# Altium PCB ESC.PcbDoc
Units mil, origin at the board's own origin, x right, y up, seen from the top; angles counter-clockwise.
Board outline 1560 x 2100 mil, 2 copper layers (Top Layer, Bottom Layer); 110 components, 75 nets, 462 pads, 139 vias.
Unrouted connection lines stored in the file: 3.
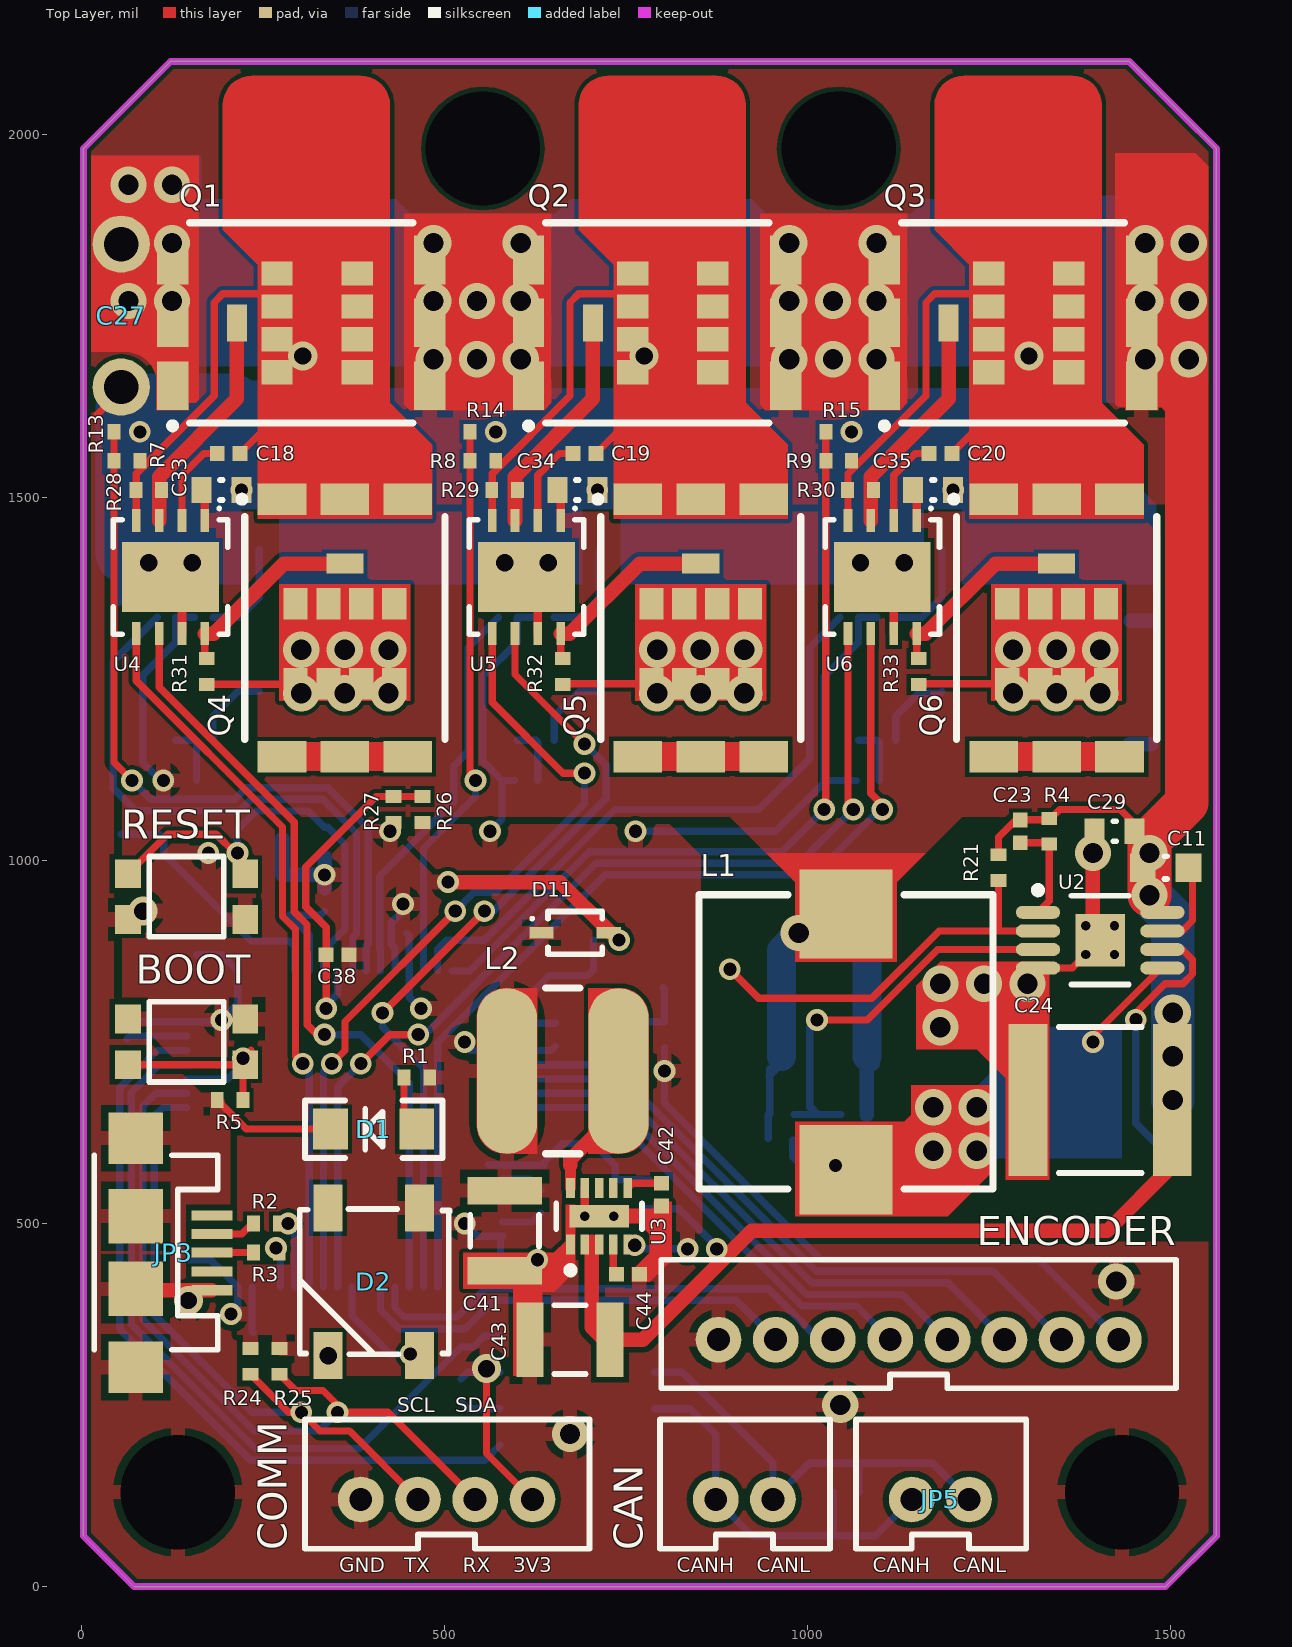
[diagram p0: Top Layer view]
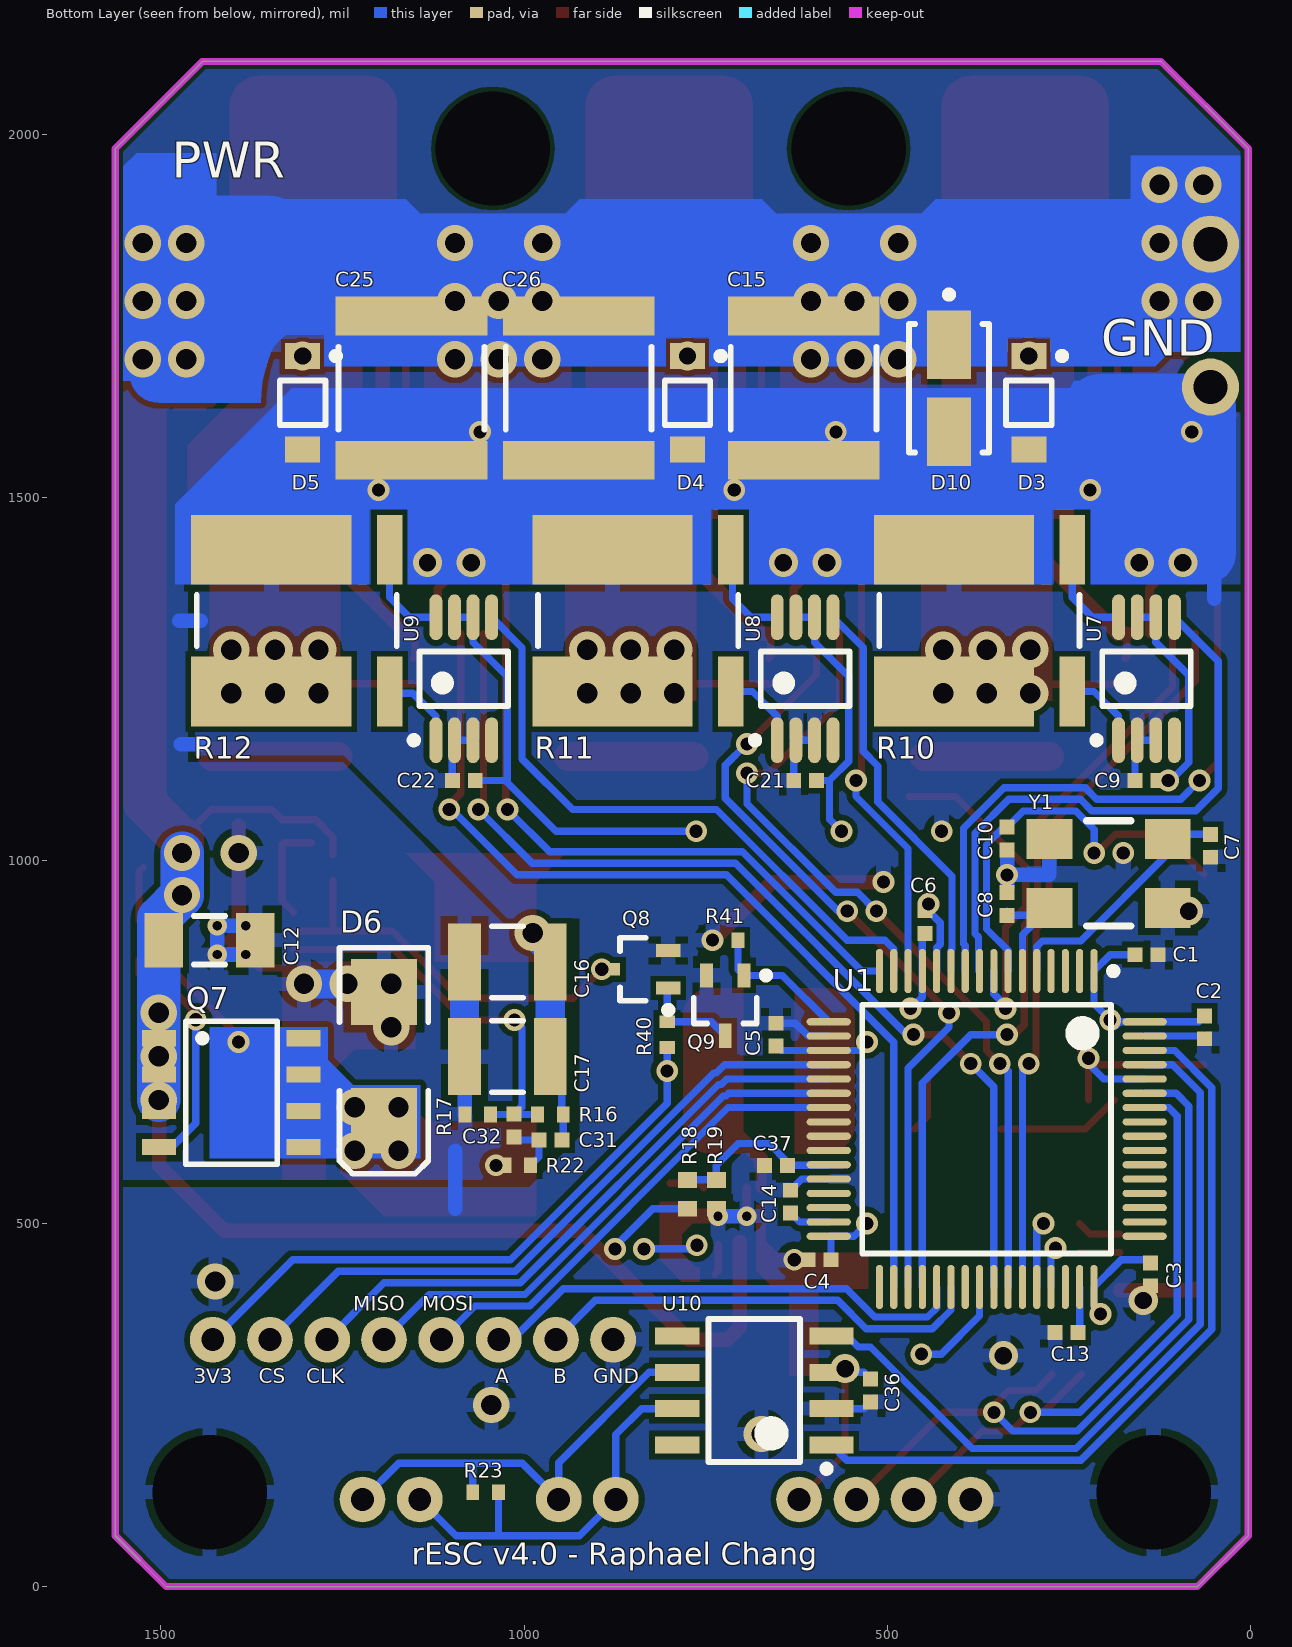
[diagram p1: Bottom Layer view, seen from below]

## Layer stack, top to bottom
Top Solder: solder mask 0.4, Solder Resist, Dk 3.5
Top Layer: signal copper 1.4
Dielectric 1: dielectric 12.6, FR-4, Dk 4.8
Bottom Layer: signal copper 1.4
Bottom Solder: solder mask 0.4, Solder Resist, Dk 3.5

## Board outline
3.01,69.71 72.72,0 1493.01,0 1563.01,70 1563.01,1980 1515,2028.01 1443.01,2100 123.01,2100 3.01,1980

## Design rules (kind name [scope] priority, off if disabled: settings)
Clearance Clearance_2 [All vs OnLayer('Keep-Out Layer')] p1: gap=5.91
Clearance Clearance_1 [(InPolygon AND InNet('GND'))] p2: gap=8
Clearance [All] p3: gap=5.91
ComponentClearance [All] p1: gap=10 collisioncheckmode=3 verticalgap=0 showdistances=FALSE
PolygonConnect [All] p1: connectstyle=Relief reliefconductorwidth=20 reliefentries=4 polygonreliefangle="90 Angle" airgapwidth=10
RoutingVias [All] p1: holewidth=28 width=50 viastyle="Through Hole" minholewidth=24 minwidth=40 maxholewidth=28 maxwidth=50
ShortCircuit ShortCircuit_1 [All vs OnLayer('Keep-Out Layer')] p1: allowed=TRUE
ShortCircuit [All] p2: allowed=FALSE
SolderMaskExpansion [All] p1: expansion=4
Width [All] p1: maxlimit=60 minlimit=10 preferedwidth=10
28 further rules are at their usual default settings.

## Classes and differential pairs
component class U_Power: C11 C12 C15 C16 C17 C18 C19 C20 C23 C24 C25 C26 C27 C29 C31 C32 C33 C34 C35 C41 C42 C43 C44 D3 D4 D5 D6 D10 D11 L1 L2 Q1 Q2 Q3 Q4 Q5 Q6 Q7 Q8 Q9 R4 R7 R8 R9 R10 R11 R12 R13 R14 R15 R16 R17 R21 R22 R28 R29 R30 R31 R32 R33 R40 R41 U2 U3 U4 U5 U6
component class U_MCU: BOOT C1 C2 C3 C4 C5 C6 C7 C8 C9 C10 C13 C14 C21 C22 C36 C37 C38 D1 D2 R1 R2 R3 R5 R18 R19 R23 R24 R25 R26 R27 RESET U1 U7 U8 U9 U10 Y1
component class ESC: CAN JP1 JP2 JP3 JP5

## Components (designator, comment, footprint, x,y, rotation, side; value= is the part's Value field where it differs from the comment)
BOOT "" SWITCH 145,750 r180 top (schematic designator SW1)
C1 "2.2uF" CAPC0402(1005)60_L 143.01,870 r0 bottom
C2 "2.2uF" CAPC0402(1005)60_L 63.01,770 r90 bottom
C3 "2.2uF" CAPC0402(1005)60_L 137.5,429.92 r90 bottom
C4 "2.2uF" CAPC0402(1005)60_L 593.01,450 r180 bottom
C5 "2.2uF" CAPC0402(1005)60_L 653.01,760 r270 bottom
C6 "4.7uF" CAPC0402(1005)60_L 448.01,915 r270 bottom
C7 "15pF" CAPC0402(1005)60_L 55,1020 r270 bottom
C8 "15pF" CAPC0402(1005)60_L 335,940 r90 bottom
C9 "0.1uF" CAPC0402(1005)60_L 143.01,1110 r0 bottom
C10 "100nF" CAPC0402(1005)60_L 335,1030 r90 bottom
C11 "0.47uF" CAPC0603(1608)100_N 1493.01,990 r180 top
C12 "10uF" CAPC1206(3216)190_M 1433.01,890 r0 bottom
C13 "2.2uF" CAPC0402(1005)60_L 253.01,350 r180 bottom
C14 "2.2uF" CAPC0402(1005)60_L 633.01,530 r270 bottom
C15 "15uF" CAPC2220(5750)280_L 615,1650 r90 bottom
C16 "47uF" CAPC1210(3225)280_N 1023.01,860 r180 bottom
C17 "47uF" CAPC1210(3225)280_N 1023.01,730 r180 bottom
C18 "0.22uF" CAPC0402(1005)60_L 203.01,1560 r180 top
C19 "0.22uF" CAPC0402(1005)60_L 693.01,1560 r180 top
C20 "0.22uF" CAPC0402(1005)60_L 1183.01,1560 r180 top
C21 "0.1uF" CAPC0402(1005)60_L 613.01,1110 r0 bottom
C22 "0.1uF" CAPC0402(1005)60_L 1083.01,1110 r0 bottom
C23 "1nF" CAPC0402(1005)60_L 1293.01,1040 r270 top
C24 "22uF" CAPC2220(5750)230_L 1403.01,670 r0 top
C25 "15uF" CAPC2220(5750)280_L 1155,1650 r90 bottom
C26 "15uF" CAPC2220(5750)280_L 925,1650 r90 bottom
C27 "2200uF" BULKCAPACITOR 55,1750 r0 top
C29 "1uF" CAPC0603(1608)100_L 1423.01,1040 r0 top
C31 "10nF" CAPC0402(1005)60_L 963.76,615 r180 bottom
C32 "0.1uF" CAPC0402(1005)60_L 1013.76,635 r270 bottom
C33 "4.7uF" CAPC0603(1608)100_L 193.01,1510 r180 top
C34 "4.7uF" CAPC0603(1608)100_L 683.01,1510 r180 top
C35 "4.7uF" CAPC0603(1608)100_L 1173.01,1510 r180 top
C36 "0.1uF" CAPC0402(1005)60_L 523.01,270 r90 bottom
C37 "0.1uF" CAPC0402(1005)60_L 653.01,580 r180 bottom
C38 "2.2uF" CAPC0402(1005)60_L 353.01,870 r180 top
C41 "47uF" CAPC1210(3225)280_L 583.01,490 r90 top
C42 "3.3nF" CAPC0402(1005)60_L 799.15,539.61 r90 top
C43 "4.7uF" CAPC1210(3225)210_L 673.01,340 r0 top
C44 "1uF" CAPC0402(1005)60_L 753.01,430 r180 top
CAN "" JST-2-PTH-VERT 913.01,120 r0 top (schematic designator JP4)
COMM "" JST-4-PTH-VERT 503.01,120 r0 top (schematic designator JP1)
D1 "LED-BLUE" LED-1206 403.01,630 r180 top
D2 "WS2812B" WS2812B 403.01,420 r270 top
D3 "MMSZ5262BT1G" ONSC-SOD-123-2-425-04_V 305,1630 r270 bottom
D4 "MMSZ5262BT1G" ONSC-SOD-123-2-425-04_V 775,1630 r270 bottom
D5 "MMSZ5262BT1G" ONSC-SOD-123-2-425-04_V 1305,1630 r270 bottom
D6 "" SMB 1193.01,730 r270 bottom
D10 "TVS 50V" VISH-DO-214AC-2_N 415,1650 r270 bottom
D11 "SP4020-01FTG" SOD323 680,900 r0 top
ENCODER "Encoder" JST-8-PTH-VERT 1153.01,340 r0 top (schematic designator JP2)
JP3 "USB" USB-MICROB 75,460 r270 top
JP5 "" JST-2-PTH-VERT 1183.01,120 r0 top
L1 "SDR0805-180ML" IHLP-4040DZ-51 1053.01,750 r90 top
L2 "SDR0805-180ML" SDR0604 663.01,710 r180 top
Q1 "IRF7749L2" DIRECTFET-9 303.01,1740 r0 top
Q2 "IRF7749L2" DIRECTFET-9 793.01,1740 r0 top
Q3 "IRF7749L2" DIRECTFET-9 1283.01,1740 r0 top
Q4 "IRF7749L2" DIRECTFET-9 363.01,1320 r270 top
Q5 "IRF7749L2" DIRECTFET-9 853.01,1320 r270 top
Q6 "IRF7749L2" DIRECTFET-9 1343.01,1320 r270 top
Q7 "MOSFET-P" SOIC127P600X175-8N 1403.01,680 r180 bottom
Q8 "BSS816NWH6327XTSA1" SOT323-3 843.01,850 r0 bottom
Q9 "BSS816NWH6327XTSA1" SOT323-3 723.01,800 r270 bottom
R1 "10R" RESC0402(1005)_L 462.24,700.83 r0 top
R2 "22R" RESC0402(1005)_L 255,500 r0 top
R3 "22R" RESC0402(1005)_L 255,460 r0 top
R4 "10K" RESC0402(1005)_L 1333.01,1040 r90 top
R5 "10K" RESC0402(1005)_L 205,670 r0 top
R7 "39K" RESC0402(1005)_L 63.01,1550 r0 top
R8 "39K" RESC0402(1005)_L 553.01,1550 r0 top
R9 "39K" RESC0402(1005)_L 1043.01,1550 r0 top
R10 "" WSL2726 373.01,1330 r270 bottom
R11 "" WSL2726 843.01,1330 r270 bottom
R12 "" WSL2726 1313.01,1330 r270 bottom
R13 "2K2" RESC0402(1005)_L 63.01,1590 r180 top
R14 "2K2" RESC0402(1005)_L 553.01,1590 r180 top
R15 "2K2" RESC0402(1005)_L 1043.01,1590 r180 top
R16 "36K" RESC0402(1005)_L 963.76,650 r180 bottom
R17 "3K9" RESC0402(1005)_L 1063.76,650 r180 bottom
R18 "200K" RESC0402(1005)_N 775,540 r90 bottom
R19 "10K" RESC0402(1005)_N 735,540 r90 bottom
R21 "200K" RESC0402(1005)_L 1263.01,990 r270 top
R22 "154K" RESC0402(1005)_L 1008.76,580 r180 bottom
R23 "120R" RESC0402(1005)_L 1053.01,130 r180 bottom
R24 "4K7" RESC0402(1005)_L 233.01,310 r90 top
R25 "4K7" RESC0402(1005)_L 273.01,310 r90 top
R26 "NTC_10K" RESC0402(1005)_L 470,1070 r270 top
R27 "10K" RESC0402(1005)_L 430,1070 r90 top
R28 "10K" RESC0402(1005)_L 93.01,1510 r0 top
R29 "10K" RESC0402(1005)_L 583.01,1510 r0 top
R30 "10K" RESC0402(1005)_L 1073.01,1510 r0 top
R31 "10K" RESC0402(1005)_L 173.01,1260 r90 top
R32 "10K" RESC0402(1005)_L 663.01,1260 r90 top
R33 "10K" RESC0402(1005)_L 1153.01,1260 r90 top
R40 "4K7" RESC0402(1005)_L 803.01,760 r270 bottom
R41 "4K7" RESC0402(1005)_L 723.01,890 r180 bottom
RESET "" SWITCH 145,950 r0 top (schematic designator SW2)
U1 "STM32F405RGT7TR" STM-LQFP64_L 363.01,630 r270 bottom
U2 "LM5085QMY/NOPB" MUY08A_N 1403.01,890 r0 top
U3 "MAX17502EATB+T" MAXM-T1032N+1_V 713.01,510 r90 top
U4 "UCC27211" DFN8 123.01,1390 r270 top
U5 "UCC27211" DFN8 613.01,1390 r270 top
U6 "UCC27211" DFN8 1103.01,1390 r270 top
U7 "AD8418" MSOP-8 143.01,1250 r90 bottom
U8 "AD8418" MSOP-8 613.01,1250 r90 bottom
U9 "AD8418" MSOP-8 1083.01,1250 r90 bottom
U10 "TCAN332" SOIC8 683.01,270 r0 bottom
Y1 "" ABRA-ABM3B-4_V 195.1,982.09 r0 bottom

## Footprints (in the part's own frame and the unit in brackets; to place one, negate y for a bottom-side part, rotate by r counter-clockwise, add the part's x,y. Pads: shape width x height; smd on the part's side, far side on the other; paste and mask are expansions set on the pad)
ABRA-ABM3B-4_V [mil] "SMT Crystal, 4-Leads, Body 5.2x3.4mm"
  rect 63x55 smd: 1(-81.5,-47.5) 2(-81.5,47.5) 2(81.5,-47.5) 3(81.5,47.5)
  silkscreen extent -30,-72 30,72, body extent -114,-52 113,51, height 39
BULKCAPACITOR [mm]
  round 2 hole 1.2: 1(0,2.5) 2(0,-2.5)
  body extent 2,-10 37,10, height 22
CAPC0402(1005)60_L [mm] "Chip Capacitor, Body 1.0x0.5mm, Height 0.6mm, IPC High Density"
  rect 0.52x0.52 smd: 1(-0.4,0) 2(0.4,0)
  body extent -0.55,-0.3 0.55,0.3, height 0.6
CAPC0603(1608)100_L [mm] "Chip Capacitor, Body 1.6x0.8mm, Height 1.0mm, IPC High Density"
  rect 0.7x0.9 smd: 1(-0.7,0) 2(0.7,0)
  silkscreen extent -0.05,-0.35 0.05,0.35, body extent -0.87,-0.47 0.88,0.48, height 1
CAPC0603(1608)100_N [mm] "Chip Capacitor, Body 1.6x0.8mm, Height 1.0mm, IPC Medium Density"
  rect 0.9x1 smd: 1(-0.8,0) 2(0.8,0)
  silkscreen extent -0.05,-0.4 0.05,0.4, body extent -0.87,-0.48 0.88,0.47, height 1
CAPC1206(3216)190_M [mm] "Chip Capacitor, Body 3.2x1.6mm, Height 1.9mm, IPC Low Density"
  rect 1.35x1.9 smd: 1(-1.6,0) 2(1.6,0)
  silkscreen extent -0.55,-0.85 0.55,0.85, body extent -1.7,-0.9 1.7,0.9, height 1.9
CAPC1210(3225)210_L [mm] "Chip Capacitor, Body 3.2x2.5mm, Height 2.1mm, IPC High Density"
  rect 0.95x2.6 smd: 1(-1.4,0) 2(1.4,0)
  silkscreen extent -0.55,-1.2 0.55,1.2, body extent -1.7,-1.35 1.7,1.35, height 2.1
CAPC1210(3225)280_L [mm] "Chip Capacitor, Body 3.2x2.5mm, Height 2.8mm, IPC High Density"
  rect 0.95x2.6 smd: 1(-1.4,0) 2(1.4,0)
  silkscreen extent -0.55,-1.2 0.55,1.2, body extent -1.7,-1.4 1.7,1.4, height 2.8
CAPC1210(3225)280_N [mm] "Chip Capacitor, Body 3.2x2.5mm, Height 2.8mm, IPC Medium Density"
  rect 1.15x2.7 smd: 1(-1.5,0) 2(1.5,0)
  silkscreen extent -0.55,-1.25 0.55,1.25, body extent -1.7,-1.4 1.7,1.4, height 2.8
CAPC2220(5750)230_L [mm] "Chip Capacitor, Body 5.7x5.0mm, Height 2.3mm, IPC High Density"
  rect 1.35x5.3 smd: 1(-2.525,0) 2(2.525,0)
  silkscreen extent -1.45,-2.55 1.45,2.55, body extent -3.05,-2.7 3.05,2.7, height 2.3
CAPC2220(5750)280_L [mm] "Chip Capacitor, Body 5.7x5.0mm, Height 2.8mm, IPC High Density"
  rect 1.35x5.3 smd: 1(-2.525,0) 2(2.525,0)
  silkscreen extent -1.45,-2.55 1.45,2.55, body extent -3.05,-2.7 3.05,2.7, height 2.8
DFN8 [mm] "SON, 8-Leads, Body 3.00x3.00mm, Pitch 0.65mm, Thermal Pad 2.00x1.47mm, IPC Medium Density"
  rect 0.8x0.3 smd: 1(-1.975,1.2) 2(-1.975,0.4) 3(-1.975,-0.4) 4(-1.975,-1.2) 5(1.975,-1.2) 6(1.975,-0.4) 7(1.975,0.4) 8(1.975,1.2)
  rect 2.45x3.38 smd: 9(0,0)
  silkscreen extent -2.45,-2 2,2, body extent -2,-2 2,2, height 1
DIRECTFET-9 [mm]
  rect 0.7x1.3 smd: 1(-2.25,0)
  rect 1.1x0.85 smd: 2(-0.85,-1.725) 2(-0.85,-0.575) 2(-0.85,0.575) 2(-0.85,1.725) 2(1.95,-1.725) 2(1.95,-0.575) 2(1.95,0.575) 2(1.95,1.725)
  rect 1.1x1.7 smd: 3(-4.5,-2.2) 3(-4.5,0) 3(-4.5,2.2) 3(4.5,-2.2) 3(4.5,0) 3(4.5,2.2)
  silkscreen extent -4.6,-3.7 3.9,3.5, body extent -4.57,-3.55 4.58,3.55, height 0.83
IHLP-4040DZ-51 [mil]
  rect 123x128 smd: 1(-176,0) 2(176,0)
  silkscreen extent -202,-202 202,202, body extent -200,-200 200,200, height 157
JST-2-PTH-VERT [mil]
  round 63 hole 31.5: 1(-39.37,0) 2(39.37,0)
  silkscreen extent -116,-68 118,110, body extent -114,-64 118,113, height 236
JST-4-PTH-VERT [mil]
  round 63 hole 31.5: 1(-118.11,0) 2(-39.37,0) 3(39.37,0) 4(118.37,0)
  silkscreen extent -195,-68 197,110, body extent -195,-67 195,110, height 236
JST-8-PTH-VERT [mil]
  round 63 hole 31.5: 1(-275.59,0) 2(-196.85,0) 3(-118.11,0) 4(-39.11,0) 5(39.89,0) 6(118.11,0) 7(196.85,0) 8(275.59,0)
  silkscreen extent -354,-67 354,110, body extent -352,-67 352,110, height 236
LED-1206 [mil]
  rect 48x56 smd: A(-59.06,0) C(60,0)
  silkscreen extent -94,-39 95,40, body extent -63,-31 63,31, height 43
MAXM-T1032N+1_V [mm] "TDFN, 10-Leads, Body 2x3mm, Pitch 0.50mm, Thermal Pad 0.8x2.08mm"
  rect 0.7x0.3 smd mask+0.076: 1(-0.99,1) 2(-0.99,0.5) 3(-0.99,0) 4(-0.99,-0.5) 5(-0.99,-1) 6(0.99,-1) 7(0.99,-0.5) 8(0.99,0) 9(0.99,0.5) 10(0.99,1)
  rect 0.8x2.08 smd mask+0.076: 11(0,0)
  silkscreen extent -2.01,-1.5 0.45,1.5, body extent -1,-1.5 1,1.5, height 0.8
MSOP-8 [mm] "SOP, 8-Leads, Body 3x3mm, Pitch 0.65mm, IPC Medium Density"
  oval 1.6x0.45 smd: 1(-2.15,0.975) 2(-2.15,0.325) 3(-2.15,-0.325) 4(-2.15,-0.975) 5(2.15,-0.975) 6(2.15,-0.325) 7(2.15,0.325) 8(2.15,0.975)
  silkscreen extent -2.27,-1.55 0.95,1.88, body extent -1.55,-1.55 1.55,1.55, height 0.05
MUY08A_N [mm] "TSOP, 8-Leads, Body 3x3mm, Pitch 0.65mm, Thermal Pad, IPC Medium Density"
  oval 1.55x0.45 smd: 1(-2.175,0.975) 2(-2.175,0.325) 3(-2.175,-0.325) 4(-2.175,-0.975) 5(2.175,-0.975) 6(2.175,-0.325) 7(2.175,0.325) 8(2.175,0.975)
  rect 1.73x1.85 smd: 9(0,0)
  silkscreen extent -2.3,-1.55 1,1.87, body extent -1.55,-1.55 1.55,1.55, height 1.09
ONSC-SOD-123-2-425-04_V [mm] "SOD, 2-Leads, Body 2.69x1.6mm"
  rect 0.91x1.22 smd: 1(-1.635,0) 2(1.635,0)
  silkscreen extent -1.76,-0.8 0.78,1.28, body extent -1.35,-0.8 1.35,0.8, height 1.35
RESC0402(1005)_L [mm] "Chip Resistor, Body 1.0x0.5mm, IPC High Density"
  rect 0.45x0.55 smd: 1(-0.45,0) 2(0.45,0)
  body extent -0.52,-0.27 0.53,0.28, height 0.4
RESC0402(1005)_N [mm] "Chip Resistor, Body 1.0x0.5mm, IPC Medium Density"
  rect 0.55x0.65 smd: 1(-0.5,0) 2(0.5,0)
  body extent -0.52,-0.27 0.53,0.28, height 0.4
SDR0604 [mm]
  rrect100% 2.1x5.8 smd: 1(-1.95,0) 2(1.95,0)
  Top Layer region: 2,2.9 0.9,2.9 0.9,-2.9 2,-2.9 2.5,-2.766 2.866,-2.4 3,-1.9 3,-1.9 3,1.9 2.866,2.4 2.5,2.766 2,2.9
  Top Layer region: -2,2.9 -0.9,2.9 -0.9,-2.9 -2,-2.9 -2.5,-2.766 -2.866,-2.4 -3,-1.9 -3,-1.9 -3,1.9 -2.866,2.4 -2.5,2.766 -2,2.9
  silkscreen extent -0.6,-2.9 0.6,2.9, body extent -2.75,-2.8 2.75,2.8, height 4.55
SMB [mm] "DO-214-AA/SMB; 2 C-Bend Leads; Body 5.3 x 3.6 mm, inc. leads (LxW)"
  rect 2.3x2.3 smd: 1(-2.25,0) 2(2.25,0)
  silkscreen extent -3.8,-1.55 4.1,1.55
SOD323 [mm] "SODFL, 2-Leads, Body 1.30x2.57mm, IPC Medium Density"
  rect 0.85x0.4 smd: 1(-1.175,0) 2(1.175,0)
  silkscreen extent -1.55,-0.75 0.95,0.75, body extent -0.95,-0.72 0.95,0.72, height 1.14
SOIC8 [mm] "SOIC, 8-Leads, Body 4.90x3.90mm, Pitch 1.27mm, IPC Medium Density"
  rect 1.55x0.6 smd: 1(-2.7,1.905) 2(-2.7,0.635) 3(-2.7,-0.635) 4(-2.7,-1.905) 5(2.7,-1.905) 6(2.7,-0.635) 7(2.7,0.635) 8(2.7,1.905)
  silkscreen extent -2.65,-2.5 1.6,2.86, body extent -2,-2.5 2,2.5, height 1.75
SOIC127P600X175-8N [mm] "SOIC, 8-Leads, Body 4.90x3.90mm, Pitch 1.27mm, IPC Medium Density"
  rect 1.194x0.56 smd: 1(-2.528,-0.635) 1(-2.528,0.635) 1(-2.528,1.905) 2(-2.528,-1.905) 3(2.527,-1.905) 3(2.527,-0.635) 3(2.527,0.635) 3(2.527,1.905)
  Top Layer region: -0.762,2.032 2.286,2.032 2.286,-2.032 -0.762,-2.032
  silkscreen extent -1.6,-2.5 1.6,2.5
SOT323-3 [mm] "SOT23, 3-Leads, Body 2.00x2.10mm, Pitch 0.65mm, IPC Medium Density"
  rect 0.85x0.45 smd: 1(-1.055,0.65) 2(-1.055,-0.65) 3(1.055,0)
  silkscreen extent -1.18,-1.1 0.63,1.55, body extent -0.63,-1.1 0.63,1.1, height 1
STM-LQFP64_L [mm] "Thin QFP, 64-Leads, Body 10x10mm, Pitch 0.5mm, IPC High Density"
  oval 1.55x0.25 smd: 1(-5.525,3.75) 2(-5.525,3.25) 3(-5.525,2.75) 4(-5.525,2.25) 5(-5.525,1.75) 6(-5.525,1.25) 7(-5.525,0.75) 8(-5.525,0.25) 9(-5.525,-0.25) 10(-5.525,-0.75) 11(-5.525,-1.25) 12(-5.525,-1.75) 13(-5.525,-2.25) 14(-5.525,-2.75) 15(-5.525,-3.25) 16(-5.525,-3.75) 33(5.525,-3.75) 34(5.525,-3.25) 35(5.525,-2.75) 36(5.525,-2.25) 37(5.525,-1.75) 38(5.525,-1.25) 39(5.525,-0.75) 40(5.525,-0.25) 41(5.525,0.25) 42(5.525,0.75) 43(5.525,1.25) 44(5.525,1.75) 45(5.525,2.25) 46(5.525,2.75) 47(5.525,3.25) 48(5.525,3.75)
  oval 0.25x1.55 smd: 17(-3.75,-5.525) 18(-3.25,-5.525) 19(-2.75,-5.525) 20(-2.25,-5.525) 21(-1.75,-5.525) 22(-1.25,-5.525) 23(-0.75,-5.525) 24(-0.25,-5.525) 25(0.25,-5.525) 26(0.75,-5.525) 27(1.25,-5.525) 28(1.75,-5.525) 29(2.25,-5.525) 30(2.75,-5.525) 31(3.25,-5.525) 32(3.75,-5.525) 49(3.75,5.525) 50(3.25,5.525) 51(2.75,5.525) 52(2.25,5.525) 53(1.75,5.525) 54(1.25,5.525) 55(0.75,5.525) 56(0.25,5.525) 57(-0.25,5.525) 58(-0.75,5.525) 59(-1.25,5.525) 60(-1.75,5.525) 61(-2.25,5.525) 62(-2.75,5.525) 63(-3.25,5.525) 64(-3.75,5.525)
  silkscreen extent -5.65,-4.35 4.35,4.55, body extent -5,-5 5,5, height 1.6
SWITCH [mm]
  rect 0.9x1 smd: 1(-2.05,0.8) 2(2.05,0.8) 3(-2.05,-0.8) 4(2.05,-0.8)
  silkscreen extent -1.3,-1.4 1.3,1.4, body extent -2.3,-1.4 2.3,1.4, height 1.9
USB-MICROB [mil]
  rect 14x56 smd: D+(0,105) D-(-25.59,105) GND(52,105) ID(26,105) VBUS(-51.18,105)
  rect 71x75 smd: MT1(-157.48,0) MT2(158,0)
  rect 75x75 smd: P$1(-50,0) P$2(50,0)
  silkscreen extent -134,-57 134,113, body extent -157,-98 157,115, height 112
VISH-DO-214AC-2_N [mm] "DO-214AC, 2-Leads, Body 4.5x2.79mm, IPC Medium Density"
  rect 2.4x1.55 smd: 1(-1.525,0) 2(1.525,0)
  silkscreen extent -3.4,-1.4 2.25,1.4, body extent -2.25,-1.4 2.25,1.39, height 2.29
WS2812B [mil]
  rect 65x40 smd: 1(-101.46,63) 2(-101.46,-62.99) 3(102,-62.99) 4(102,63)
  silkscreen extent -100,-102 100,104, body extent -105,-97 105,97, height 67
WSL2726 [mm]
  rect 2.44x5.6 smd: 1(-2.48,-0.89) 2(2.48,-0.89)
  rect 2.44x0.89 smd: 3(-2.48,3.245) 4(2.48,3.245)
  silkscreen extent -0.9,-3.5 0.9,3.5

## Part data
BOOT RESET: library part DIPT-DTSM-6, "Switch, SPNO Push Button SMD"
C1 C2 C3 C4 C5 C13 C14 C38: library part CMP-1034-02125-1, "CAP 2.2uF 6.3V ±10% 0402 (1005 Metric) Thickness 0.6mm SMD"
C6: library part CMP-1034-02136-1, "CAP 4.7uF 6.3V ±10% 0402 (1005 Metric) Thickness 0.6mm SMD"
C7 C8: library part CMP-1034-01906-1, "CAP 15nF 6.3V ±10% 0402 (1005 Metric) Thickness 0.6mm SMD"
C9 C10 C21 C22 C36 C37: library part CMP-1034-02060-1, "CAP 100nF 6.3V ±5% 0402 (1005 Metric) Thickness 0.6mm SMD"
C11: library part CMP-1035-02708-1, "CAP 470nF 50V ±10% 0603 (1608 Metric) Thickness 1mm SMD"
C12: library part CMP-1037-04982-1, "CAP 10uF 50V ±10% 1206 (3216 Metric) Thickness 1.9mm SMD"
C15 C25 C26: library part CMP-1042-00760-1, "CAP 4.7uF 100V ±10% 2220 (5750 Metric) Thickness 2.8mm SMD"
C16 C17: library part CMP-1038-02295-1, "CAP 47uF 16V ±10% 1210 (3225 Metric) Thickness 2.8mm SMD"
C18 C19 C20: library part CMP-1034-02089-1, "CAP 220nF 16V ±10% 0402 (1005 Metric) Thickness 0.6mm SMD"
C23: library part CMP-1034-01624-1, "CAP 1nF 50V ±1% 0402 (1005 Metric) Thickness 0.6mm SMD"
C24: library part CMP-1042-00782-1, "CAP 22uF 50V -20% to +80% 2220 (5750 Metric) Thickness 2.2mm SMD"
C27: library part "CAP 2200uF", "Polarized Capacitor (Axial)"
C29: library part CMP-1035-02745-1, "CAP 1uF 50V ±10% 0603 (1608 Metric) Thickness 1mm SMD"
C31: library part CMP-1034-01885-1, "CAP 10nF 50V ±5% 0402 (1005 Metric) Thickness 0.6mm SMD"
C32: library part CMP-1034-02077-1, "CAP 100nF 50V ±10% 0402 (1005 Metric) Thickness 0.6mm SMD"
C33 C34 C35: library part CMP-1035-02788-1, "CAP 4.7uF 16V ±10% 0603 (1608 Metric) Thickness 1mm SMD"
C41: library part CMP-1038-02290-1, "CAP 47uF 6.3V ±10% 1210 (3225 Metric) Thickness 2.8mm SMD"
C42: library part CMP-1034-01765-1, "CAP 3.3nF 6.3V ±5% 0402 (1005 Metric) Thickness 0.6mm SMD"
C43: library part CMP-1038-02103-1, "CAP 2.2uF 100V ±10% 1210 (3225 Metric) Thickness 2.1mm SMD"
C44: library part CMP-1034-02113-1, "CAP 1uF 6.3V ±10% 0402 (1005 Metric) Thickness 0.6mm SMD"
CAN JP5: library part JST_2_VERT
COMM: library part JST_4_VERT
D1: library part LED-BLUE1206
D3 D4 D5: library part CMP-1060-00504-1, "Zener Voltage Regulator, 500 mW, 2-Pin SOD-123, Pb-Free, Tape and Reel"
D6: library part "D Schottky", "Schottky Diode"
D10: library part CMP-0548-00253-1, "Transient Voltage Suppressor, 6.40 to 231 V, 45 V Stand-off Voltage, Uni-Directional, -55 to 155 degC, 2-pin DO-214AC, Pb-Free, Tape and Reel"
ENCODER: library part JST_8_VERT
JP3: library part USB_MICROB_PLUG-SMT
L1 L2: "Inductor"
Q1 Q2 Q3 Q4 Q5 Q6: "N-Channel MOSFET"
Q7: "P-Channel MOSFET"
Q8 Q9: library part MOSFET-N, "N-Channel MOSFET"
R1: library part CMP-1011-00026-1, "10R 0.063W 5% 0402 (1005 Metric)  SMD"
R2 R3: library part CMP-1011-00034-1, "22R 0.063W 5% 0402 (1005 Metric)  SMD"
R4 R26 R27: library part CMP-1011-00623-1, "10K 0.063W 1% 0402 (1005 Metric)  SMD"
R5 R19 R28 R29 R30 R31 R32 R33: library part CMP-1011-00098-1, "10K 0.063W 5% 0402 (1005 Metric)  SMD"
R7 R8 R9: library part CMP-1011-00112-1, "39K 0.063W 5% 0402 (1005 Metric)  SMD"
R10 R11 R12: library part WSL27261L000FEB, "Resistor"
R13 R14 R15: library part CMP-1011-00082-1, "2K2 0.063W 5% 0402 (1005 Metric)  SMD"
R16: library part CMP-1011-00685-1, "36K 0.063W 1% 0402 (1005 Metric)  SMD"
R17: library part CMP-1011-00576-1, "3K9 0.063W 1% 0402 (1005 Metric)  SMD"
R18: library part CMP-1011-00091-1, "5K1 0.063W 5% 0402 (1005 Metric)  SMD"
R21: library part CMP-1011-00768-1, "200K 0.063W 1% 0402 (1005 Metric)  SMD"
R22: library part CMP-1011-00755-1, "154K 0.063W 1% 0402 (1005 Metric)  SMD"
R23: library part CMP-1011-00052-1, "120R 0.063W 5% 0402 (1005 Metric)  SMD"
R24 R25 R40 R41: library part CMP-1011-00090-1, "4K7 0.063W 5% 0402 (1005 Metric)  SMD"
U1: library part CMP-0243-00089-2, "ARM Cortex-M4 32-bit MCU+FPU, 210 DMIPS, 1024 kB Flash, 192 kB Internal RAM, 51 I/Os, 64-pin LQFP, -40 to 105 degC, Tape and Reel"
U2: library part CMP-0069-01314-2, "75V Constant On-Time PFET Buck Switching Controller, 8-pin eMSOP, Pb-Free"
U3: library part CMP-1264-00005-1, "Ultra-Small, High-Efficiency, Synchronous Step-Down DC-DC Converter, 4.5 to 60 V, 1 A, -40 to 125 degC, 10-Pin TDFN (T1032N+1), RoHS, Tape and Reel"
Y1: library part ABRA-ABM3B-4

## Free pads (board coordinates)
  round 125.98 hole 157.48: 0(133.01,130) 0(553.01,1980) 1(1043.01,1980) 1(1433.01,130)

## Via types
v1: diameter 50, hole 28, Top Layer to Bottom Layer, 63 vias
v2: diameter 30, hole 18, Top Layer to Bottom Layer, 53 vias
v3: diameter 40, hole 24, Top Layer to Bottom Layer, 13 vias
v4: diameter 27, hole 13, Top Layer to Bottom Layer, 6 vias
v5: diameter 15.75, hole 7.87, Top Layer to Bottom Layer, 4 vias

## Nets (pads, with @x,y where several pads share a name; then routed paths per layer and width w, separated by ;. In a path a pad name is that pad's centre, name@x,y a point inside that pad or via, vN(x,y) a via of type N, cw(c..) or ccw(c..) an arc to the next point about the centre after c; other vN are vias at no path point)
12V: C16.2 C17.2 C31.2 C33.2 C34.2 C35.2 L1.2 R16.2 U4.1 U5.1 U6.1 | length 546.7
  Top Layer w10: L1.2 L1.2@1091.29,926
  Top Layer w12: C33.2 170.25,1505.2 U4.1 ; C34.2 660.25,1505.2 U5.1 ; C35.2 1150.25,1505.2 U6.1
  Top Layer w20: v1(988.01,900) 1027.01,900 L1.2
  Bottom Layer w10: C31.2@946.04,616.97 R16.2 ; C17.2@947.26,703.31 C17.2@948.01,704.05 ; R16.2@948.01,650 C17.2@948.01,704.05 ; C17.2@948.01,713.31 C17.2@948.01,704.05 ; C17.2@963.95,720 C17.2@948.01,704.05
  Bottom Layer w40: C17.2 C16.2 963.95,875.94 v1(988.01,900)
C1: U1.9 U7.5 | length 826.2
  Bottom Layer w10: U7.5 44.09,1274.12 44.09,1099.27 75.18,1068.19 218.28,1068.19 233.99,1083.9 332.74,1083.9 379.15,1037.49 379.15,898.98 374.15,893.98 U1.9@374.15,847.52
C2: U1.11 U8.5 | length 555.4
  Bottom Layer w10: U1.11 412.22,876.65 410.96,877.91 410.96,978.46 513.01,1080.5 513.01,1130 533.01,1150 533.01,1293.03 U8.5
C3: U1.15 U9.5 | length 863.1
  Bottom Layer w10: U1.15@490.52,847.52 490.52,877.51 503.01,890 555,890 735,1070 933.01,1070 1003.01,1140 1003.01,1293.03 U9.5
CAN_RX: U1.61 U10.4 | length 1054.6
  Bottom Layer w10: U1.61 107.08,718.58 68.91,680.42 68.91,361.1 240.01,190 383.01,190 523.01,330 540,330 555,345 U10.4
CAN_TX: U1.62 U10.1 | length 1053.3
  Bottom Layer w10: U1.62 104.27,738.27 53.01,687.01 53.01,354.51 233.42,174.09 555.8,174.09 U10.1
CANH: CAN.1 JP5.1 R23.2 U10.7 | length 560
  Bottom Layer w10: U10.7 838.01,245 873.64,209.37 CAN.1 923.64,70 1035,70 ; R23.2 1035.29,70.29 1035,70 ; JP5.1 1093.64,70 1035,70
CANL: CAN.2 JP5.2 R23.1 U10.6 | length 616.6
  Bottom Layer w10: U10.6 828.01,295 952.38,170.63 CAN.2 1002.38,170 1070.73,170 ; R23.1 1070.73,170 ; JP5.2 1172.38,170 1070.73,170
CLK: ENCODER.6 U1.21 | length 839.3
  Bottom Layer w10: U1.21 721.11,698.9 728.67,691.34 732.27,691.34 1005.42,418.19 1192.93,418.19 ENCODER.6
CS: ENCODER.7 U1.20 | length 926.1
  Bottom Layer w10: U1.20 723.92,718.58 735.26,707.24 738.86,707.24 1012.01,434.09 1255.76,434.09 ENCODER.7
GHA: Q1.1 R28.2 U4.3 | length 316.6
  Top Layer w20: U4.3 107.26,1528.29 214.43,1635.46 Q1.1
GHB: Q2.1 R29.2 U5.3 | length 316.6
  Top Layer w20: U5.3 597.26,1528.29 704.43,1635.46 Q2.1
GHC: Q3.1 R30.2 U6.3 | length 316.6
  Top Layer w20: U6.3 1087.26,1528.29 1194.43,1635.46 Q3.1
GLA: Q4.1 R31.2 U4.8 | length 268.3
  Top Layer w10: U4.8 170.25,1280.47 R31.2
  Top Layer w20: U4.8 182.51,1312.24 278.85,1408.58 Q4.1
GLB: Q5.1 R32.2 U5.8 | length 268.3
  Top Layer w10: U5.8 660.25,1280.47 R32.2
  Top Layer w20: U5.8 672.51,1312.24 768.85,1408.58 Q5.1
GLC: Q6.1 R33.2 U6.8 | length 258.3
  Top Layer w10: U6.8 1150.25,1280.47 R33.2
  Top Layer w20: U6.8 1162.51,1312.24 1258.85,1408.58 Q6.1@1333.01,1408.58
GND: C1.1 C2.1 C3.1 C4.1 C5.1 C6.1 C7.2 C8.2 C9.2 C10.1 C12.1 C13.1 C14.1 C15.1 C16.1 C17.1 C21.2 C22.2 C24.1 C25.1 C26.1 C27.2 C29.1 C33.1 C34.1 C35.1 C36.1 C37.1 C38.1 C41.1 C42.1 C43.1 C44.1 COMM.1 D1.C D2.3 D3.2 D4.2 D5.2 D6.1 D10.2 D11.2 ENCODER.1 JP3.GND JP3.MT1 JP3.MT2 JP3.P$1 JP3.P$2 pad.0@133.01,130 pad.1@1433.01,130 Q8.2 Q9.2 R5.1 R10.1 R11.1 R12.1 R13.1 R14.1 R15.1 R17.1 R19.1 R27.1 R41.1 RESET.3 RESET.4 U1.12 U1.18 U1.28 U1.63 U2.4 U2.9 U3.1 U3.9 U3.11 U4.7 U4.9 U5.7 U5.9 U6.7 U6.9 U7.2 U7.3 U8.2 U8.3 U9.2 U9.3 U10.2 Y1.2 | length 2803.9
  Top Layer w10: 21.67,1613.38 C27.2@57.75,1649.46 ; v3(85,930) v3@95,930 ; R5.1 227.28,630 D1.C ; U2.4 1364.62,851.61 U2.9
  Top Layer w12: U4.9 138.76,1374.25 U4.7 ; U5.9 628.76,1374.25 U5.7 ; U3.9 v4(693.32,510) U3.11 ; U6.9 1118.76,1374.25 U6.7
  Top Layer w20: JP3.P$2 77,408 JP3.GND ; v2(505,970) 659.27,970 D11.2@729.27,900 ; C29.1@1393.01,1047.56 v1(1393.01,1010) 1393.01,900 U2.9
  Top Layer w40: v1(1303.01,830) 1303.01,840 1303.6,839.41 C24.1
  Bottom Layer w10: C2.1 66.71,757.95 U1.63 ; U7.3 U7.2 158.76,1162.4 C9.2 ; U1.12 431.91,879.46 426.87,884.5 426.87,914.01 443.61,930.75 C6.1 448.01,935 v2(443.01,940) ; C36.1 532.26,245 U10.2 ; U1.28 617.65,561.1 C14.1 ; U1.18 608.82,757.95 626.61,775.75 C5.1 ; U8.3 U8.2 628.76,1162.4 C21.2 ; U9.3 U9.2 1098.76,1162.4 C22.2
  Bottom Layer w20: 50,1360 50,1400 ; Y1.2@276.6,1029.59 276.6,980 v2(335,980) ; C8.2@335,961.5 v2(335,980) ; C10.1@335,1004.25 v2(335,980) ; v4(693.32,510) v4(733.01,510) ; C17.1@1080.73,718.66 C17.1@1081.47,719.41 ; R17.1 C17.1@1081.47,719.41 ; C17.1@1081.47,728.66 C17.1@1081.47,719.41 ; C17.1@1090.06,720 1082.06,720 C17.1@1081.47,719.41 ; 1095,520 1095,600 ; v4(1383.32,870.31) v4(1422.69,870.31) v4(1422.69,909.68) v4(1383.32,909.68) ; 1443.01,1160 1473.01,1160 ; 1445,1330 1475,1330
  Bottom Layer w40: C17.1 C16.1 ; D6.1 1204.43,830 v1(1243.01,830) v1(1303.01,830)
  other v1: 673.01,210 1045,250 1425,420 1183.01,770 1183.01,830
  other v2: 628.01,450 740.73,890 175,1010 425,1040 220.57,1510 710.57,1510 1200.57,1510 80.73,1590 570.73,1590 1060.73,1590
  other v3: 340.02,318 147.5,393.94 93.01,1410 153.01,1410 583.01,1410 643.01,1410 1073.01,1410 1133.01,1410
  other v5: 1383.32,870.31 1422.69,870.31 1383.32,909.68 1422.69,909.68
LED: D2.4 U1.40 | length 141.7
  Bottom Layer w10: U1.40 372.85,372.86 425.71,320 v2(453.01,320)
MISO: ENCODER.5 U1.22 | length 752.9
  Bottom Layer w10: U1.22 718.31,679.21 722.09,675.43 725.68,675.43 998.83,402.28 1130.61,402.28 ENCODER.5
MOSI: ENCODER.4 U1.23 | length 665.7
  Bottom Layer w10: U1.23 719.09,659.53 992.24,386.38 1067.52,386.38 ENCODER.4
NetC7_1: C7.1 U1.5 Y1.1 | length 348.9
  Bottom Layer w10: C7.1 107.44,1035.75 Y1.1 113.6,1009.01 233.67,888.94 286.43,888.94 294.11,881.26 U1.5
NetC8_1: C8.1 U1.6 Y1.3 | length 138.3
  Bottom Layer w10: U1.6 313.8,897.39 286.94,924.25 329.25,924.25 C8.1@335,930
NetC10_2: C10.2 RESET.1 RESET.2 U1.7 | length 581
  Top Layer w10: RESET.1 118.7,1035.91 185.73,1035.91 211.64,1010 v2(215,1010)
  Bottom Layer w10: v2(215,1010) 215,1042.41 240.58,1068 312.62,1068 335,1045.61 339.54,1045.61 363.25,1021.9 363.25,905.57 333.48,875.81 U1.7
NetC11_1: C11.1 U2.7 | length 122.6
  Top Layer w10: U2.7 1515.8,902.8 1530.06,917.05 1530.06,984.45 C11.1
NetC13_2: C13.2 U1.47 | length 63.4
  Bottom Layer w10: U1.47 235.06,352.2 C13.2
NetC14_2: C14.2 U1.31 | length 57.5
  Bottom Layer w10: U1.31 620.8,502.05 C14.2
NetC18_2: C18.2 U4.2 | length 113.3
  Top Layer w10: U4.2@138.76,1477.76 138.76,1530.23 168.53,1560 C18.2
NetC19_2: C19.2 U5.2 | length 123.3
  Top Layer w10: U5.2 628.76,1530.23 658.53,1560 C19.2
NetC20_2: C20.2 U6.2 | length 113.3
  Top Layer w10: U6.2@1118.76,1477.76 1118.76,1530.23 1148.53,1560 C20.2
NetC23_2: C23.2 R4.1 U2.1 | length 141.2
  Top Layer w10: C23.2 1331.04,1024.25 R4.1 1333.01,944.02 U2.1
NetC31_1: C31.1 C32.2 R22.2 | length 75.8
  Bottom Layer w10: R22.2 979.5,591.54 C31.1 1009.5,615 C32.2
NetC32_1: C32.1 R16.1 R17.2 U2.3 | length 553.2
  Top Layer w10: v2(1013.01,780) 1082.23,780 1179.44,877.2 U2.3 U2.3@1313.68,880.91
  Bottom Layer w10: R16.1 R17.2 ; v2(1013.01,780) 1003.01,770 1003.01,660 1004.5,660 C32.1
NetC37_2: C37.2 R18.2 R19.2 U1.27 | length 270.8
  Bottom Layer w10: U1.27@560.53,580.79 U1.27 581.32,580 C37.2 637.26,584.4 662.86,610 705,610 735.31,579.68 735.31,560 772.69,560 772.38,559.69 R18.2@783.01,559.69
NetC38_2: C38.2 R26.1 R27.2 U1.8 | length 488.2
  Top Layer w10: v2(337.26,796.1) 333.28,796.1 331.2,798.19 337.26,804.25 C38.2 337.26,907.73 309.09,935.89 309.09,990.73 406.08,1087.72 R26.1
  Bottom Layer w10: v2@333.01,800 331.2,798.19 333.28,796.1 v2(337.26,796.1) 333.01,796.1 353.17,816.26 U1.8
NetC42_2: C42.2 U3.6 | length 49.4
  Top Layer w10: U3.6 758.76,555.35 C42.2
NetC44_2: C44.2 U3.4 | length 42.9
  Top Layer w10: U3.4 732.69,434.57 C44.2
NetD1_A: D1.A R1.1 | length 78.1
  Top Layer w10: R1.1 444.53,647.54 D1.A
NetD6_2: D6.2 L1.1 Q7.3 R22.1 U2.5 | length 240.2
  Top Layer w10: v2(1393.01,750) 1393.01,758.05 1486.58,851.61 U2.5
  Bottom Layer w10: D6.2 1174.43,641.42 1173.01,642.83 v1(1173.01,660) v1(1233.01,660)
  other v1: 1173.01,600 1233.01,600
  other v2: 1038.76,580
NetL2_1: L2.1 U3.10 | length 188.4
  Top Layer w15: U3.10 673.64,580
  Top Layer w20: 673.64,580 673.64,588.64 739.78,654.78 L2.1
NetQ4_2: Q4.2 R10.2 R31.1 | length 122.5
  Top Layer w10: R31.1 294.15,1242.28 Q4.2@295.1,1243.23
  other v1: 303.01,1230 363.01,1230 423.01,1230 303.01,1290 363.01,1290 423.01,1290
NetQ5_2: Q5.2 R11.2 R32.1 | length 122.5
  Top Layer w10: R32.1 663.95,1243.23 Q5.2@785.1,1243.23
  other v1: 793.01,1230 853.01,1230 913.01,1230 793.01,1290 853.01,1290 913.01,1290
NetQ6_2: Q6.2 R12.2 R33.1 | length 122.5
  Top Layer w10: R33.1 1153.95,1243.23 Q6.2@1275.1,1243.23
  other v1: 1283.01,1230 1343.01,1230 1403.01,1230 1283.01,1290 1343.01,1290 1403.01,1290
NetQ7_1: Q7.2 U2.6 | length 383
  Top Layer w10: v2(1452.1,780.51) 1452.1,789.87 1492.23,830 1516.63,830 1530.06,843.43 1530.06,862.95 1515.8,877.2 U2.6
  Bottom Layer w10: v2(1452.1,780.51) 1452.1,637.9 1485,605 Q7.2
NetQ8_1: Q8.1 Q9.3 R40.1 | length 135.3
  Bottom Layer w10: Q9.3 742.26,777.72 R40.1 803.01,822.87 Q8.1
NetQ8_3: Q8.3 R21.2 U2.2 | length 557.3
  Top Layer w10: v2(893.01,850) 933.01,810 1088.43,810 1181.23,902.8 U2.2 ; 1263.01,902.8 R21.2
  Bottom Layer w10: Q8.3 v2(893.01,850)
NetQ9_1: Q9.1 R41.2 U1.17 | length 195.1
  Bottom Layer w10: U1.17 644.43,841.54 Q9.1 705.29,849.41 R41.2
NetR2_2: R2.2 U1.44 | length 91.3
  Bottom Layer w10: v2(285,500) 294.11,490.89 U1.44
NetR3_2: R3.2 U1.45 | length 69.8
  Top Layer w10: v2@262.69,460 269.73,460 268.21,461.53 v2(268.21,466.02)
  Bottom Layer w10: v2(268.21,466.02) 274.43,459.8 U1.45
NetR5_2: BOOT.1 BOOT.2 R5.2 U1.60 | length 325.1
  Top Layer w10: BOOT.2 BOOT.1@222.72,718.5 ; R5.2 BOOT.1@222.72,718.5 ; 233.72,738.5 v2(222.72,727.5) BOOT.1@222.72,718.5
  Bottom Layer w10: U1.60 201.91,698.9 222.72,719.71 v2(222.72,727.5)
NetR7_1: R7.1 R13.2 U1.10 | length 1053.2
  Top Layer w10: R13.2 R7.1 45.29,1134.71 v2(70,1110)
  Bottom Layer w10: v2(70,1110) 95.91,1084.09 211.69,1084.09 227.4,1099.81 339.33,1099.81 395.06,1044.08 395.06,885.06 392.54,882.54 U1.10
NetR8_1: R8.1 R14.2 U1.14 | length 775.6
  Top Layer w10: R14.2 R8.1 535.29,1117.46 v2(542.88,1109.87)
  Bottom Layer w10: U1.14 471.28,1016.28 543,1088 543,1109.99 v2(542.88,1109.87)
NetR9_1: R9.1 R15.2 U1.16 | length 1125.5
  Top Layer w10: v2(1023.01,1070) 1025.29,1072.28 R9.1 R15.2
  Bottom Layer w10: U1.16 535.01,847.52 699.3,1011.81 964.82,1011.81 v2(1023.01,1070)
NetR10_3: R10.3 U7.8 | length 140.7
  Bottom Layer w10: U7.8 217.65,1334.65 245.25,1362.24 R10.3
NetR10_4: R10.4 U7.1 | length 111
  Bottom Layer w10: U7.1 181.39,1198.39 215.37,1232.36 R10.4
NetR11_3: R11.3 U8.8 | length 140.7
  Bottom Layer w10: U8.8 687.65,1334.65 713.01,1360 713.01,1425.39 R11.3
NetR11_4: R11.4 U8.1 | length 111
  Bottom Layer w10: U8.1 651.39,1198.39 685.37,1232.36 R11.4
NetR12_3: R12.3 U9.8 | length 140.7
  Bottom Layer w10: U9.8 1157.65,1334.65 1185.25,1362.24 R12.3
NetR12_4: R12.4 U9.1 | length 111
  Bottom Layer w10: U9.1 1121.39,1198.39 1153.13,1230.12 1183.01,1230.12 R12.4
NetU1_34: U1.34 U6.6 | length 1335.4
  Top Layer w10: U6.6 1087.26,1092.38 1103.01,1076.64 v2(1103.01,1070)
  Bottom Layer w10: U1.34 490.96,749.59 721.37,980 1009.64,980 1103.01,1073.36 v2(1103.01,1070)
NetU1_35: U1.35 U5.6 | length 1116.4
  Top Layer w10: v2(415,790) v2(555,930) ; U5.6 597.26,1255.75 v2(693.01,1160)
  Bottom Layer w10: v2(415,790) 415,770 471.28,713.72 U1.35 ; v2(555,930) 567.49,930 723.01,1085.52 723.01,1130.73 v2@693.74,1160 ; v2(693.01,1160) v2@693.74,1160 ; v2@699.64,1160 v2@693.74,1160
NetU1_36: U1.36 U4.6 | length 1077.5
  Top Layer w10: U4.6 107.26,1238.24 293.19,1052.31 293.19,929.3 310.91,911.59 310.91,873.86 311.36,873.41 311.36,773.64 325,760 v2(335,760)
  Bottom Layer w10: v2(335,760) 385,760 451.59,693.41 U1.36
NetU1_41: U1.41 U6.5 | length 1388.9
  Top Layer w10: v2(385,720) 425,760 v2(464,760) ; U6.5 1055.76,1077.24 v2(1063.01,1070)
  Bottom Layer w10: U1.41 353.17,688.17 v2(385,720) ; v2(464,760) 473.01,760 708.91,995.91 988.79,995.91 1062.89,1070 v2(1063.01,1070)
NetU1_42: U1.42 U5.5 | length 1136.9
  Top Layer w10: v2(345,720) 363.17,738.17 363.17,778.17 v2(515,930) ; U5.5 565.76,1217.67 663.44,1120 v2(693.01,1120)
  Bottom Layer w10: U1.42 333.48,709.53 343.95,720 v2(345,720) ; v2(515,930) 540.91,955.91 570.91,955.91 693.01,1078.01 v2(693.01,1120)
NetU1_43: U1.43 U4.5 | length 994.5
  Top Layer w10: U4.5 75.76,1247.24 277.28,1045.73 277.28,922.72 295,905 295,730 v2(305,720)
  Bottom Layer w10: v2(305,720) 313.8,711.2 U1.43@313.8,416.34
QUAD_A: ENCODER.3 U1.37 | length 682.2
  Bottom Layer w10: U1.37 431.91,383.6 444.44,371.06 517.2,371.06 556.14,410 946.13,410 1016.13,340 ENCODER.3
QUAD_B: ENCODER.2 U1.38 | length 624.8
  Bottom Layer w10: U1.38 412.22,380.79 437.85,355.16 529.12,355.16 568.06,394.09 902.06,394.09 ENCODER.2
SA: C18.1 D3.1 Q1.2 Q4.3 R7.2 R28.1 U4.4 | length 760.4
  Top Layer w10: U4.4@75.76,1477.76 75.76,1532.33 183.01,1639.58 183.01,1768.01 195,1780 269.54,1780 Q1.2@269.54,1807.91 ; C18.1 269.54,1610.79 Q1.2@269.54,1672.09
  Top Layer w40: Q4.3@276.39,1142.83 363.01,1142.83 Q4.3@449.62,1142.83
  other v3: 305,1694.37
SB: C19.1 D4.1 Q2.2 Q5.3 R8.2 R29.1 U5.4 | length 770.4
  Top Layer w10: U5.4 565.76,1532.33 673.01,1639.58 673.01,1768.01 685,1780 759.54,1780 Q2.2@759.54,1807.91 ; C19.1 759.54,1610.79 Q2.2@759.54,1672.09
  Top Layer w40: Q5.3@766.39,1142.83 853.01,1142.83 Q5.3@939.62,1142.83
  other v3: 775,1694.37
SC: C20.1 D5.1 Q3.2 Q6.3 R9.2 R30.1 U6.4 | length 770.4
  Top Layer w10: U6.4 1055.76,1532.33 1163.01,1639.58 1163.01,1768.01 1175,1780 1249.54,1780 Q3.2@1249.54,1807.91 ; C20.1 1249.54,1610.79 Q3.2@1249.54,1672.09
  Top Layer w40: Q6.3@1256.39,1142.83 1343.01,1142.83 Q6.3@1429.62,1142.83
  other v3: 1305,1694.37
SER_RX: COMM.3 R25.1 U1.59 | length 1042.8
  Top Layer w10: R25.1 295.29,270 333.01,270 353.01,250 v2(353.01,240) 422.38,240 COMM.3
  Bottom Layer w10: U1.59 102.22,679.21 84.82,661.81 84.82,367.69 238.41,214.09 327.1,214.09 v2@347.1,234.09
SER_TX: COMM.2 R24.1 U1.58 | length 883
  Top Layer w10: R24.1 285.29,240 v2(303.01,240) 328.91,214.09 369.54,214.09 COMM.2
  Bottom Layer w10: U1.58 112.54,659.53 100.73,647.72 100.73,374.27 235,240 v2(303.01,240)
USB_DM: JP3.D- R2.1 | length 61.3
  Top Layer w10: JP3.D- 220.91,485.59 R2.1@235.31,500
USB_DP: JP3.D+ R3.1 | length 55.3
  Top Layer w10: JP3.D+ R3.1@235.31,460
VCC: BOOT.3 BOOT.4 C1.2 C2.2 C3.2 C4.2 C5.2 C6.2 C9.1 C21.1 C22.1 C36.2 C41.2 COMM.4 D2.1 D11.1 ENCODER.8 L2.2 R1.2 R24.2 R25.2 R26.2 R40.2 U1.1 U1.13 U1.19 U1.32 U1.48 U1.64 U3.5 U7.6 U7.7 U8.6 U8.7 U9.6 U9.7 U10.3 | length 3225.3
  Top Layer w10: v3(558.01,300) 558.01,183.37 COMM.4 ; U3.5 753.4,470 v2(762.1,470)
  Bottom Layer w10: C2.2 71.12,777.64 U1.64 179.23,777.64 184.89,771.98 184.99,771.98 v2(193.01,780) 215.37,802.36 U1.1 192.89,870 C1.2 ; v2(113.01,1110) 113.01,1106.38 84.86,1134.53 84.86,1254.86 130.21,1300.21 U7.6 U7.7 ; 148.76,450 177.85,450 U1.48 215.37,384.37 v2(206.24,375.24) ; C6.2 451.59,895.67 U1.13 451.59,811.42 467.1,795.91 v2(468.01,795.91) ; C36.2 532.26,295 U10.3@568.01,295 ; v2(528.01,500) 545.65,482.36 U1.32 577.26,479.09 C4.2 ; v2(528.01,750) 528.01,746.54 536.28,738.27 U1.19 647.02,738.27 C5.2 ; v3(558.01,300) 558.01,305 U10.3@568.01,295 ; v2(563.01,1040) 579.39,1056.38 579.39,1110 ; U10.3 U10.3@568.01,295 ; C21.1 579.39,1110 ; U8.7 U8.6 600.21,1300.21 553.01,1253.01 553.01,1136.38 579.39,1110 ; v2(762.1,470) 757.1,465 v2(835,465) ; v2(763.01,1040) 956.02,1040 1023.01,1106.99 1023.01,1253.01 1070.21,1300.21 U9.6 U9.7 ; R40.2 v2(803.01,710) 803.01,665.59 1018.6,450 1318.6,450 ENCODER.8 ; 1026.02,1110 C22.1
VDD: C11.2 C12.2 C15.2 C23.1 C24.2 C25.2 C26.2 C27.1 C29.2 C43.2 D10.1 Q1.3 Q2.3 Q3.3 Q7.1 R4.2 R18.1 R21.1 U2.8 U3.2 U3.3 | length 2762.3
  Top Layer w10: R21.1 1263.01,1031.79 1286.97,1055.75 C23.1 1333.01,1055.75 1347.26,1070 1430.57,1070 v1@1470.88,1029.69
  Top Layer w20: 703.01,475 703.01,356.99 720,340 C43.2 773.01,340 923.01,490 1413.01,490 1502.42,579.41 C24.2
  Top Layer w40: C24.2 1502.42,789.41 v1(1503.01,790)
  Top Layer w60: v1@1463.01,1690 1479.9,1673.11 1522.1,1630.91 1522.1,1079.09 v1@1470.88,1027.87 ; v1(1470.88,952.13) v1(1470.88,1010) v1@1470.88,1027.87 ; v1@1470.88,1029.69 v1@1470.88,1027.87
  Bottom Layer w10: R18.1 822.69,520.32 875,468.01 v2(875,465)
  Bottom Layer w60: v1(1470.88,1010) v1(1470.88,952.13) 1503.01,920 v1(1503.01,790) v1(1503.01,730) v1(1503.01,670)
  other v1: 485,1690 545,1690 605,1690 975,1690 1035,1690 1095,1690 1465,1690 1525,1690 65,1770 125,1770 485,1770 545,1770 605,1770 975,1770 1035,1770 1095,1770 1465,1770 1525,1770 125,1850 485,1850 605,1850 975,1850 1095,1850 1465,1850 1525,1850 65,1930 125,1930
pads on no net: D2.2 JP3.ID JP3.VBUS U1.2 U1.3 U1.4 U1.24 U1.25 U1.26 U1.29 U1.30 U1.33 U1.39 U1.46 U1.49 U1.50 U1.51 U1.52 U1.53 U1.54 U1.55 U1.56 U1.57 U3.7 U3.8 U7.4 U8.4 U9.4 U10.5 U10.8

## Polygon pours and split planes (outlines as drawn)
GND on Top Layer "GND_L01_P053" (solid, remove dead copper, pour order 53): 45,1710 45,800 205,640 205,475 1615,475 1615,40 1505,-70 1475,-100 -5,-100 -95,-10 -95,40 -95,1360 -95,1570
GND on Top Layer "GND_L01_P051" (solid, remove dead copper, pour order 51): 45,900 240,900 240,981.64 185.73,1035.91 118.7,1035.91 118.7,1033.7 45,960
GND on Top Layer "GND_L01_P044" (solid, remove dead copper, pour order 44): 305,721.99 510,926.99 510,955 405,1060 383.01,1060 305,981.99
VDD on Top Layer "VDD_L01_P046" (solid, remove dead copper, pour order 46): -26.99,1490 -26.99,2000 93.01,2120 1443.01,2120 1593.01,1970 1593.01,1490
12V on Top Layer "12V_L01_P045" (solid, remove dead copper, pour order 45): 983.01,860 1123.01,860 1123.01,970 1213.01,1060 1463.01,1060 1493.01,1090 1493.01,1439.97 1452.97,1480 163.01,1480 163.01,1360 243.01,1280 243.01,1120 303.01,1060 893.01,1060 983.01,970
VCC on Top Layer "VCC_L01_P052" (solid, remove dead copper, pour order 52): 852.95,1007.05 810,1050 405,1050 296.41,1050 56.41,1290 56.41,798.59 215,640 215,340 265,290 585,290 695,290 855,450
VDD on Bottom Layer "VDD_L02_P050" (solid, remove dead copper, pour order 50): -26.99,1700 1353.01,1700 1353.01,1680 1383.01,1650 1593.01,1650 1593.01,2120 -26.99,2120
GND on Bottom Layer "GND_L02_P049" (solid, remove dead copper, pour order 49): 1603.01,560 1033.01,560 943.01,650 933.01,660 933.01,910 1025,910 1250,1135 1463.01,1135 1463.01,1390 1603.01,1390
GND on Bottom Layer "GND_L02_P048" (solid, remove dead copper, pour order 48): -46.99,1380 1603.01,1380 1603.01,1690 -46.99,1690
GND on Bottom Layer "GND_L02_P022" (solid, remove dead copper, pour order 47): -16.99,1370 1453.01,1370 1453.01,1145 1248.01,1145 1023.01,920 923.01,920 923.01,620 993.01,550 1623.01,550 1623.01,80 1513.01,-30 1483.01,-60 63.01,-60 33.01,-60 -56.99,30 -56.99,1330

## Keep-outs
Keep-Out Layer:
  lines w10: 3.01,69.71 72.72,0 1493.01,0 1563.01,70 1563.01,1980 1515,2028.01 1443.01,2100 1423.01,2100 123.01,2100 3.01,1980 3.01,1910 3.01,69.71

## Other copper
Top Layer:
  region net SC: 1223.01,1820 1223.01,1470 1463.01,1470 1463.01,1571.99 1405,1630 1405,1900 1175,1900 1175,1868.01
  region net 12V: 972.48,980.53 983.01,970 983.01,860 1123.01,860 1123.01,970 1163.01,1010 943.01,1010
  region net GND: 1273.01,560 1333.01,560 1333.01,860 1183.01,860 1150,826.99 1150,740 1233.01,740 1273.01,700
  region net NetD6_2: 983.01,510 1193.01,510 1253.01,570 1253.01,690 1143.01,690 1143.01,650 1133.01,640 983.01,640
  region net GND: 758.17,420 783.01,420 813.01,450 813.01,530 788.01,530 788.01,520 743.01,520 743.01,500 768.01,500 783.01,485 783.01,460 763.01,440 758.17,440
  region net NetQ4_2: 273.01,1380 453.01,1380 453.01,1220 273.01,1220
  region net NetQ5_2: 763.01,1380 943.01,1380 943.01,1220 763.01,1220
  region net NetQ6_2: 1253.01,1380 1433.01,1380 1433.01,1220 1253.01,1220
  region net VDD: 452.05,1620 637.71,1620 647.5,1629.79 647.5,1890 445,1890 445,1627.05
  region net VDD: 103.01,1620 148.01,1620 148.01,1860 103.01,1860
  region net VDD: 1437.34,1620 1483.01,1620 1483.01,1860 1437.34,1860
  region net VDD: 1551.89,1623.74 1428.31,1623.74 1423.9,1628.15 1423.9,1973.74 1533.55,1973.74 1551.89,1955.39
  region net VDD: 942.05,1620 1127.71,1620 1137.5,1629.79 1137.5,1890 935,1890 935,1627.05
  region net SB: 733.01,1820 733.01,1470 973.01,1470 973.01,1571.99 915,1630 915,1900 685,1900 685,1868.01
  region net SA: 243.01,1820 243.01,1470 483.01,1470 483.01,1571.99 425,1630 425,1900 195,1900 195,1868.01
  region net GND: 595.17,290 635,290 635,406.18 651.18,406.18 680,435 680,526 667.01,526 667.01,475.81 650.69,459.49 525.92,459.49 525.92,410.28 594.65,410.28
  region net VDD: 105,1630 157.71,1630 162.12,1634.41 162.12,1970 14.13,1970 14.13,1700 60,1700 cw(c60,1655) 105,1655
  region net SA: 425,1900 425,2040 ccw(c385,2040) 385,2080 235,2080 ccw(c235,2040) 195,2040 195,1900
  region net SB: 915,1900 915,2040 ccw(c875,2040) 875,2080 725,2080 ccw(c725,2040) 685,2040 685,1900
  region net SC: 1405,1900 1405,2040 ccw(c1365,2040) 1365,2080 1215,2080 ccw(c1215,2040) 1175,2040 1175,1900
Bottom Layer:
  region net VDD: 85,1750 85,1726.26 131.26,1680 275,1680 275,1720.5 334.92,1720.5 334.92,1680 745.08,1680 745.08,1720.5 804.92,1720.5 804.92,1680 1275.08,1680 1275.08,1750
  region net NetD6_2: 1143.01,590 1432.97,590 1433.01,770.04 1270.15,770.04 1270.15,725.15 1235,690 1143.01,690
  region net VDD: 14.13,1700 165,1700 165,1970 14.13,1970
  region net VDD: 1551.89,1660 1423.9,1660 1423.9,1973.74 1533.55,1973.74 1551.89,1955.39
  region net GND: 75,1660 243.01,1660 248.01,1650 1320,1650 1480,1490 1480,1380 1213.01,1380 1213.01,1483.67 1160,1483.67 1160,1380 743.01,1380 743.01,1483.67 689.73,1483.67 689.73,1380 273.01,1380 273.01,1483.67 220,1483.67 220,1380 83.01,1380 cw(c83,1430) 33.01,1430 33.01,1618.01 cw(c75,1618.01)
  region net VDD: 1362.72,1630 1503.01,1630 ccw(c1503.01,1670) 1543.01,1670 1543.01,1850 ccw(c1483.01,1850.01) 1483.01,1910 1163.01,1910 1143.01,1890 943.01,1890 923.01,1910 673.01,1910 653.01,1890 453.01,1890 433.01,1910 93.01,1910 ccw(c93,1855.01) 38.01,1855 38.01,1776.99 ccw(c91.26,1776.99) 91.26,1723.74 1327.23,1723.74 cw(c1288.78,1667.39) 1348.16,1700.97 cw(c1173.28,1628.13)
  region net VDD: 1300,1750.97 ccw(c1340.19,1763.94) 1327.23,1723.74 cw(c1315.44,1687.19) 1351.99,1698.98 cw(c1140.74,1630.81) 1360.53,1661.91 ccw(c1397.28,1667.11) 1397.28,1630 1503,1630 ccw(c1503,1670) 1543.01,1670 1543.01,1855.73 ccw(c1483.74,1855.74) 1483.74,1915 1350,1915 ccw(c1350,1865) 1300,1865
  region net GND: 20,1422.9 20,1625 cw(c65,1625) 65,1670 205,1670 cw(c205,1620) 255,1620 255,1560.03 cw(c-527.49,1547.52) 255,1535 cw(c194.19,1543.04) 225,1490 ccw(c240.51,1467.28) 213.01,1466.72 213.01,1421.6 cw(c171.41,1421.6) 171.41,1380 62.9,1380 cw(c62.9,1422.9)

## Silkscreen, mask and mechanical layers (free items; w line width, h text height)
Top Overlay:
  text "SCL" at 435,240 h20
  text "SDA" at 515,240 h20
  text "GND" at 355,20 h20
  text "TX" at 445,20 h20
  text "RX" at 525,20 h20
  text "3V3" at 595,20 h20
  text "CANH" at 820,20 h20
  text "CANL" at 930,20 h20
  text "CANH" at 1090,20 h20
  text "CANL" at 1200,20 h20
Bottom Overlay:
  text "PWR" at 1485,1940 h50
  text "GND" at 205,1695 h50
  text "MOSI" at 1140,380 h20
  text "MISO" at 1235,380 h20
  text "GND" at 905,280 h20
  text "B" at 960,280 h20
  text "A" at 1040,280 h20
  text "CLK" at 1300,280 h20
  text "CS" at 1365,280 h20
  text "3V3" at 1455,280 h20
  text "rESC v4.0 - Raphael Chang" at 1155,30 h30